# Altium PCB CH32H417MEU6-UHSIF-Bottom-R0.PcbDoc (part 1 of 2)
Units mm, origin at the board's own origin, x right, y up, seen from the top; angles counter-clockwise.
Board outline 65 x 45 mm, 4 copper layers (Top Layer, Layer 1, Layer 2, Bottom Layer), stack 0.603 mm thick; 56 components, 86 nets, 278 pads, 436 vias.
Unrouted connection lines stored in the file: 33.
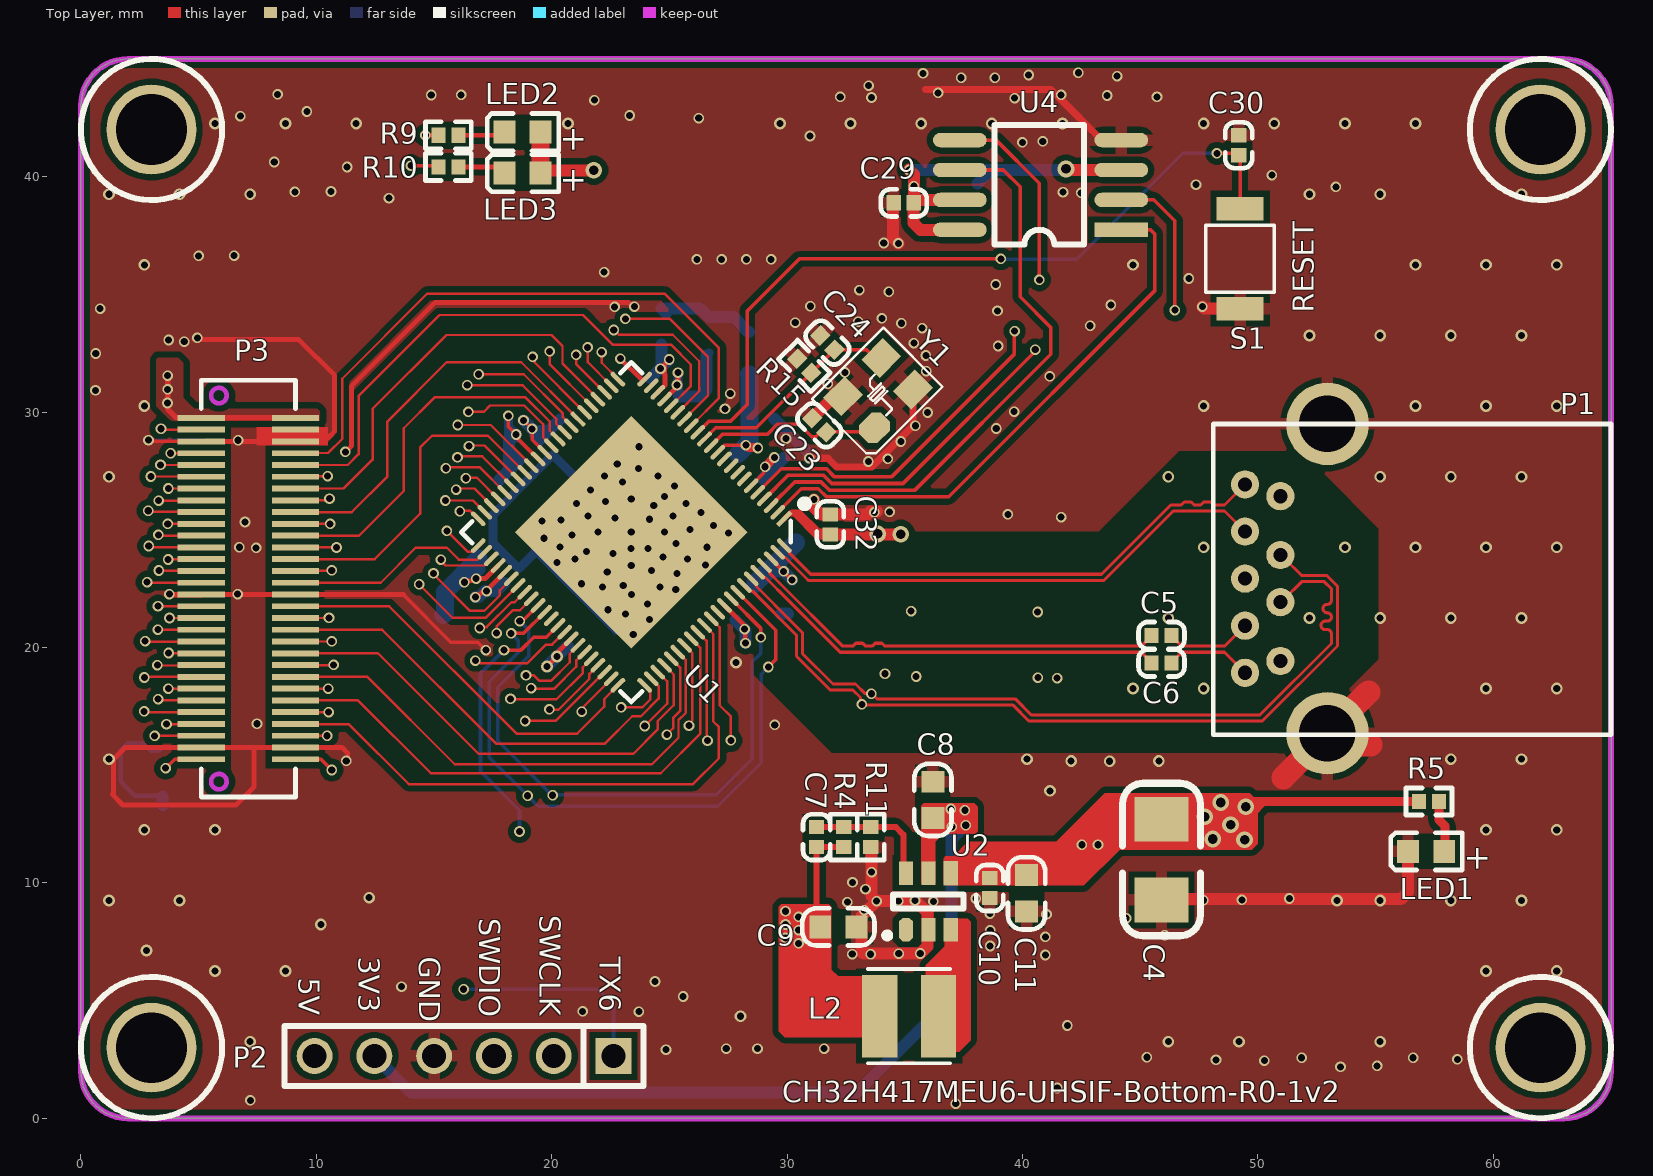
[diagram p0: Top Layer view]
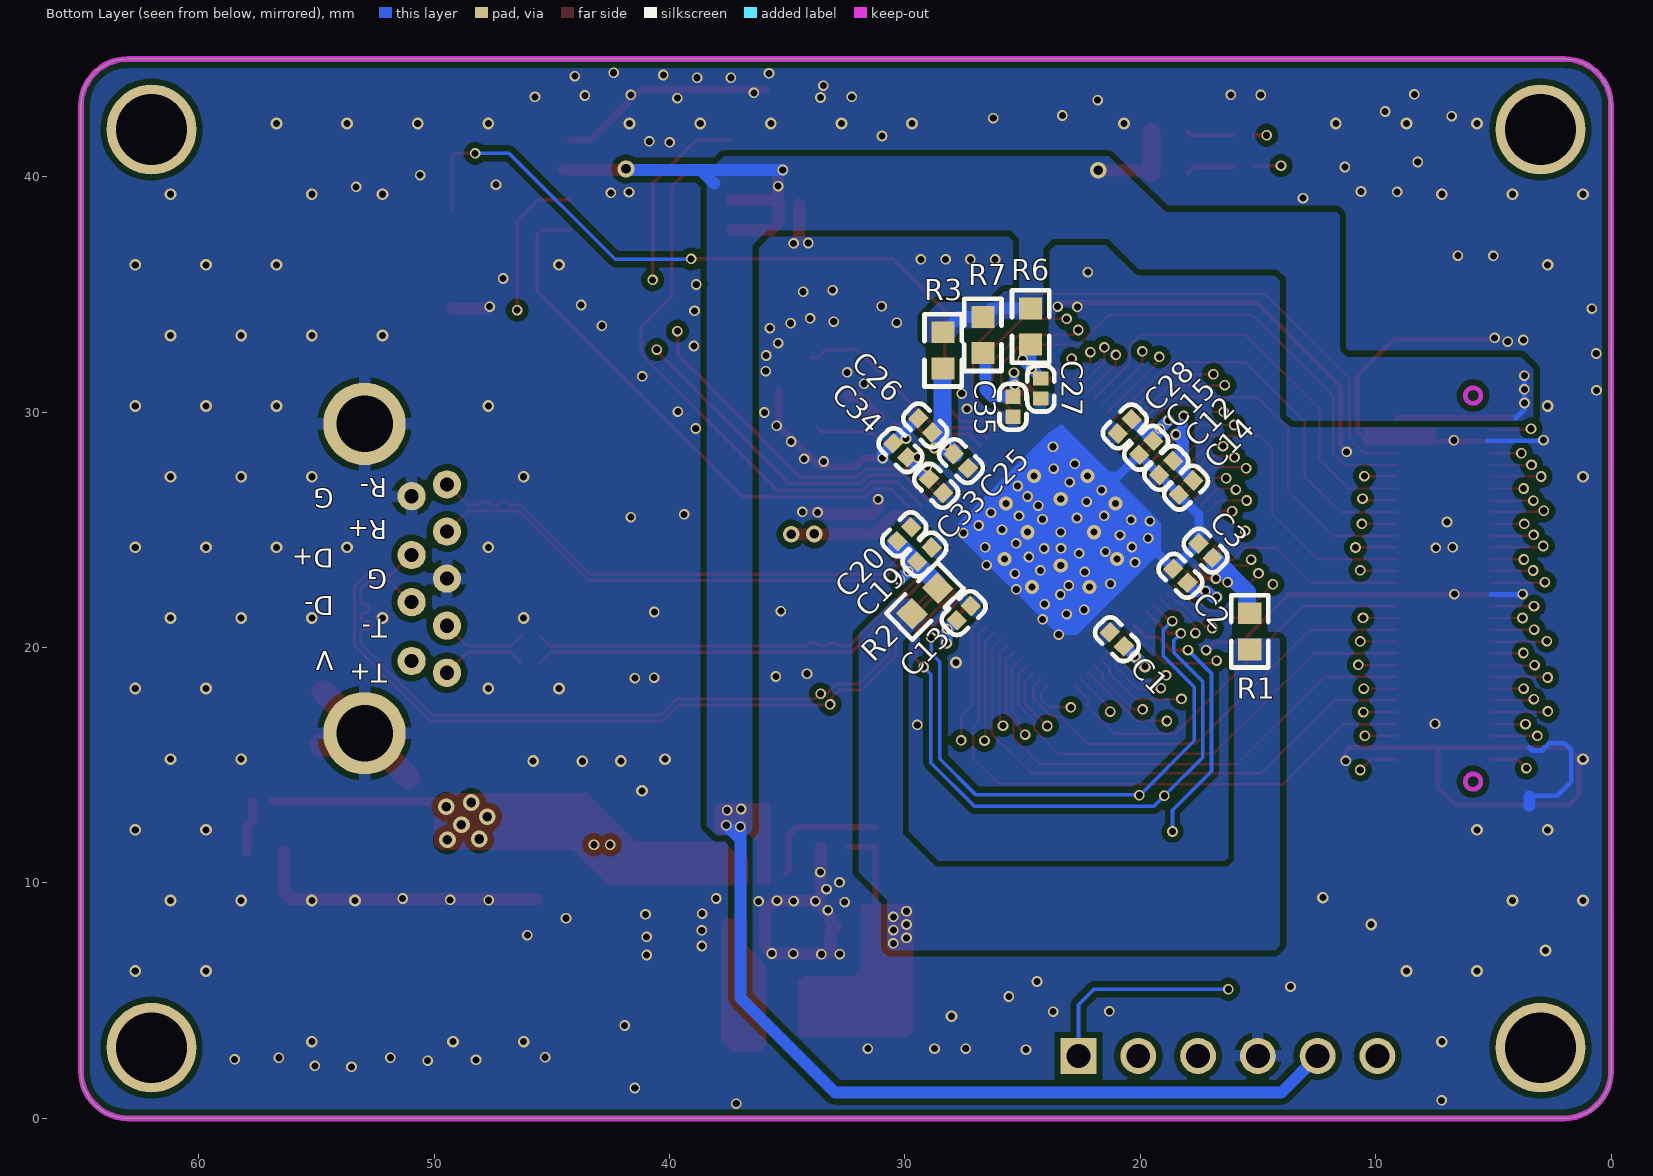
[diagram p1: Bottom Layer view, seen from below]
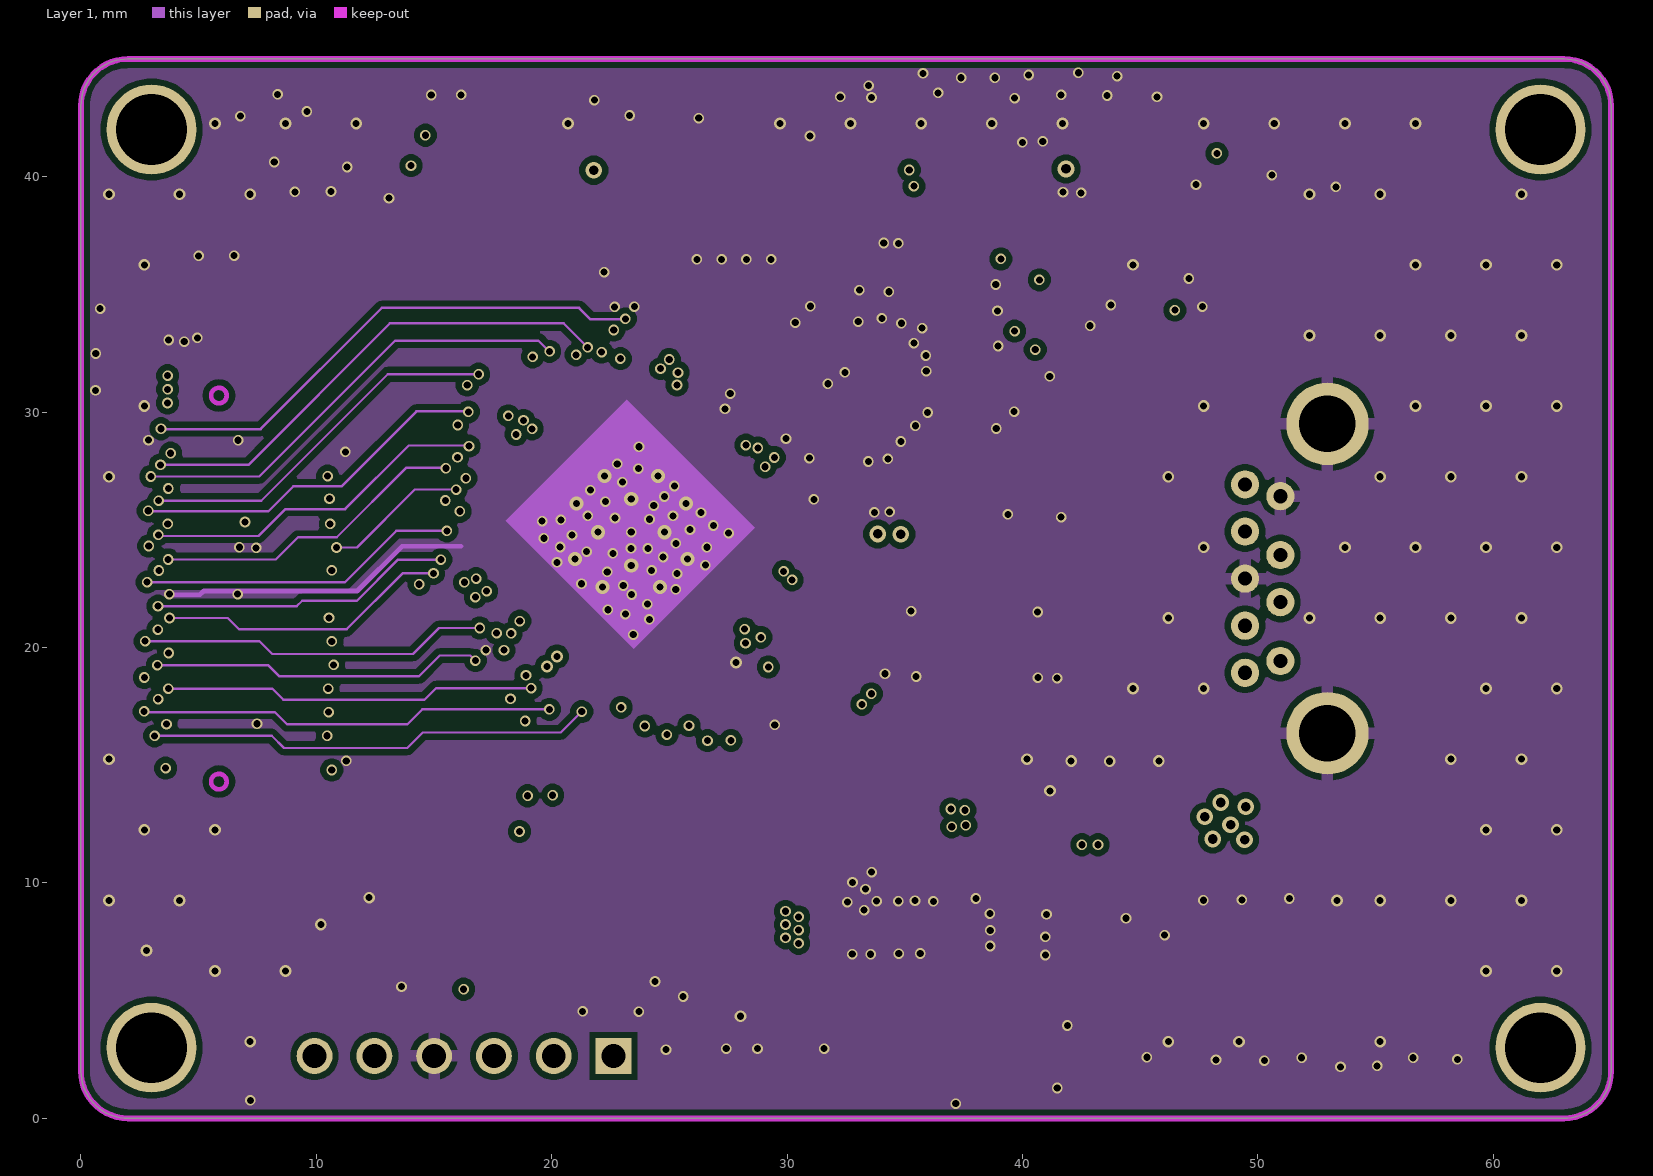
[diagram p2: Layer 1]
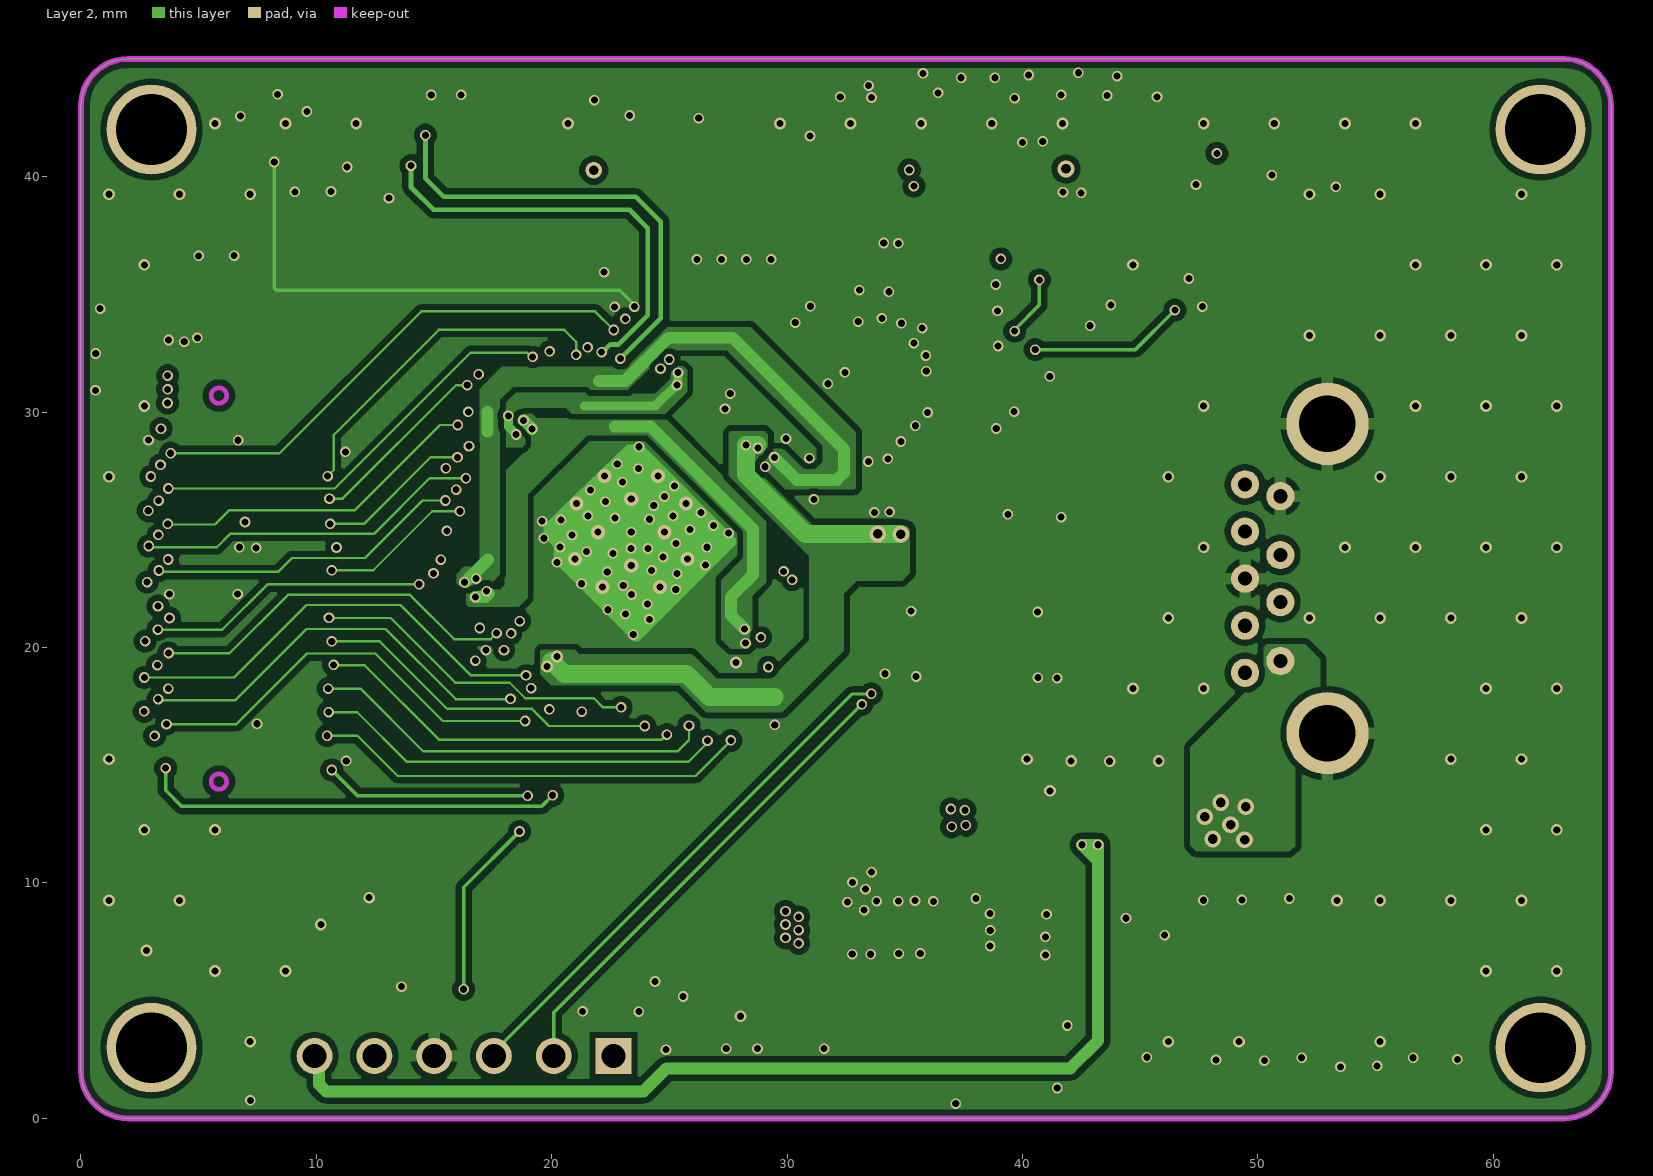
[diagram p3: Layer 2]

## Layer stack, top to bottom
Top Solder: solder mask 0.0102, Solder Resist, Dk 3.5
Top Layer: signal copper 0.0356
Dielectric 2: prepreg 0.0711, PP-006, Dk 4.1
Layer 1: signal copper 0.035
Dielectric 1: dielectric 0.32, FR-4, Dk 4.8
Layer 2: signal copper 0.035
Dielectric 3: prepreg 0.0711, PP-006, Dk 4.1
Bottom Layer: signal copper 0.0356
Bottom Solder: solder mask 0.0102, Solder Resist, Dk 3.5

## Board outline
0,2 ccw(c2,2) 2,0 63,0 ccw(c63,2) 65,2 65,43 ccw(c63,43) 63,45 2,45 ccw(c2,43) 0,43

## Design rules (kind name [scope] priority, off if disabled: settings)
Clearance Clearance_1 [InPolygon] p1: gap=0.254 ignorepadtopadclearanceinfootprint=FALSE
Clearance [All] p2: gap=0.127 ignorepadtopadclearanceinfootprint=FALSE except(0.102: Arc-SMDPad Track-SMDPad; 0.152: Arc-THPad Arc-Via Track-THPad Track-Via Via-Fill Via-Poly Via-Region)
ComponentClearance [All] p1 off: gap=0.254 collisioncheckmode=3 verticalgap=0.254 showdistances=FALSE
DiffPairsRouting [All] p1: maxlimit=0.254 minlimit=0.127 mostfreqgap=0.203 toplayer_minwidth=0.102 toplayer_maxwidth=0.381 toplayer_prefwidth=0.203 midlayer1_minwidth=0.102 midlayer1_maxwidth=0.381 midlayer1_prefwidth=0.203 midlayer2_minwidth=0.102 midlayer2_maxwidth=0.381 midlayer2_prefwidth=0.203 bottomlayer_minwidth=0.102 bottomlayer_maxwidth=0.381 bottomlayer_prefwidth=0.203 maxuncoupledlength=12.7
HoleToHoleClearance [All] p1: gap=0.203 allowstackedmicrovias=TRUE
MinimumAnnularRing [All] p1: minimumring=0.07
MinimumSolderMaskSliver [All] p1 off: minsoldermaskwidth=0.254
PlaneConnect [All] p1: planeconnectstyle=Direct reliefexpansion=0.508 reliefentries=4 reliefconductorwidth=0.254 reliefairgap=0.254
PolygonConnect PolygonConnect_2 [InPolygonClass('New Class')] p1: connectstyle=Direct reliefconductorwidth=0.254 reliefentries=4 polygonreliefangle="90 Angle" airgapwidth=0.254
PolygonConnect PolygonConnect_1 [IsVia] p2: connectstyle=Direct reliefconductorwidth=0.254 reliefentries=4 polygonreliefangle="90 Angle" airgapwidth=0.254
PolygonConnect [All] p3: connectstyle=Relief reliefconductorwidth=0.508 reliefentries=4 polygonreliefangle="90 Angle" airgapwidth=0.254
RoutingVias [All] p1: holewidth=0.2 width=0.45 viastyle="Through Hole" minholewidth=0.15 minwidth=0.3 maxholewidth=0.711 maxwidth=1.27
SilkToSilkClearance [All] p1 off: silktosilkclearance=0.254
SilkToSolderMaskClearance [IsPad] p1 off: minsilkscreentomaskgap=0.254 clearancetoexposedcopper=TRUE
SolderMaskExpansion [All] p1: expansion=0.051 istentingtop=FALSE
Width [All] p1: maxlimit=2.54 minlimit=0.102 preferedwidth=0.127
23 further rules are at their usual default settings.

## Classes and differential pairs
net class NewClass: UFP0 UFP1 UFP2 UFP3 UFP4 UFP5 UFP6 UFP7 UFP8 UFP9 UFP10 UFP11 UFP12 UFP13 UFP14 UFP15 UFP16 UFP17 UFP18 UFP19 UFP20 UFP21 UFP22 UFP23 UFP24 UFP25 UFP26 UFP27 UFP28 UFP29 UFP30 UFP31 UFP32 UFP33 UFP34 UFP35 UFP36 UFP37 UFP38 UFP39 UFP40 UFP41 UFP42 UFP43 UFP44 UFP45 UFP46 UFP47 UFPCLK
polygon class "New Class": 1V2 3V3 +5V VDD33 VDDIO VDDK VIO18
component class CH32H417MEU6-UHSIF-Bottom-R0: C1 C2 C3 C4 C5 C6 C7 C8 C9 C10 C11 C12 C13 C14 C15 C19 C20 C23 C24 C25 C26 C27 C28 C29 C30 C32 C33 C34 C35 L2 LED1 LED2 LED3 P1 P2 P3 R1 R2 R3 R4 R5 R6 R7 R9 R10 R11 R15 S1 U1 U2 U4 Y1
differential pair NewDifferentialPair2: +SWCLK -SWDIO
differential pair NewDifferentialPair1: +NetC5_2 -NetC6_2
differential pair USB_SSTX: +USB_SSTX_p -USB_SSTX_n
differential pair USB_SSRX: +USB_SSRX_p -USB_SSRX_n

## Components (designator, comment, footprint, x,y, rotation, side; value= is the part's Value field where it differs from the comment)
C1 "0.1uF" 0402_C 20.692,20.047 r315 bottom
C2 "0.1uF" 0402_C 17.994,22.744 r315 bottom
C3 "0.1uF" 0402_C 17.525,24.416 r135 bottom
C4 "47uF" 3528_C 45.903,12.704 r90 top
C5 "0.1uF" 0402_C 45.476,20.508 r90 top
C6 "0.1uF" 0402_C 45.476,19.34 r90 top
C7 "NC(4.7pF)" 0402_C 31.25,11.518 r180 top
C8 "10uF" 0603_C 36.194,14.293 r270 top
C9 "10uF" 0603_C 32.947,8.127 r180 top
C10 "1uF" 0402_C 38.61,9.358 r180 top
C11 "10uF" 0603_C 40.171,8.788 r90 top
C12 "0.1uF" 0402_C 18.594,27.928 r225 bottom
C13 "0.1uF" 0402_C 27.802,21.158 r45 bottom
C14 "10uF" 0402_C 17.756,27.089 r225 bottom
C15 "0.1uF" 0402_C 20.05,28.181 r45 bottom
C19 "0.1uF" 0402_C 28.865,24.247 r225 bottom
C20 "2.2uF" 0402_C 29.728,25.11 r225 bottom
C23 "20pF" 0402_C 31.068,29.738 r45 top
C24 "20pF" 0402_C 31.413,33.249 r45 top
C25 "0.1uF" 0402_C 27.318,27.616 r315 bottom
C26 "10uF" 0402_C 29.435,29.733 r135 bottom
C27 "0.1uF" 0402_C 24.224,30.57 r0 bottom
C28 "2.2uF" 0402_C 20.956,29.087 r45 bottom
C29 "0.1uF" 0402_C 34.53,38.885 r90 top
C30 "0.1uF" 0402_C 49.186,41.757 r0 top
C32 "0.1uF" 0402_C 31.829,25.654 r0 top
C33 "0.1uF" 0402_C 28.371,26.562 r315 bottom
C34 "2.2uF" 0402_C 30.488,28.679 r135 bottom
C35 "0.1uF" 0402_C 25.408,29.801 r0 bottom
L2 "2.2uH" CD32 35.181,4.34 r180 top
LED1 "RED" 0603+ 57.913,11.335 r180 top
LED2 "BLUE" 0603+ 19.528,41.892 r180 top
LED3 "GREEN" 0603+ 19.528,40.148 r180 top
P1 "USB3.0-A" USB3.0-A-RECEPTACLE 50.952,19.424 r90 top
P2 "HEADER 6" SIP6-2.54mm 22.624,2.646 r270 top
P3 "HEADER 30x2" BTB-60P-P0.5-MR 7.112,22.5 r270 top
R1 "0R" 0603 15.348,21.451 r270 bottom
R2 "0R" 0603 28.608,22.518 r315 bottom
R3 "0R" 0603 28.375,31.851 r90 bottom
R4 "0Ω" 0402 32.401,11.518 r90 top
R5 "1K" 0402 57.691,13.456 r180 top
R6 "0R" 0603 24.659,32.864 r90 bottom
R7 "0R" 0603 26.685,32.503 r90 bottom
R9 "470Ω" 0402 15.184,41.757 r0 top
R10 "470Ω" 0402 15.184,40.413 r0 top
R11 "NC(200k)" 0402 33.553,12.368 r270 top
R15 "NC" 0402 30.425,32.261 r315 top
S1 "" 贴片按键 49.239,38.635 r270 top
U1 "CH32H417MEU6" QFN88_10X10 23.378,24.895 r135 top
U2 "CH2003V" SOT-23-6 35.049,8.015 r0 top
U4 "SPI FLASH" SOIC-8_208mil 44.194,37.742 r90 top
Y1 "25M" XT3225 33.716,29.329 r45 top
? "Comment" HOLE 62,3 r0 top
? "Comment" HOLE 3,3 r0 top
? "Comment" HOLE 3,42 r0 top
? "Comment" HOLE 62,42 r0 top

## Footprints (in the part's own frame and the unit in brackets; to place one, negate y for a bottom-side part, rotate by r counter-clockwise, add the part's x,y. Pads: shape width x height; smd on the part's side, far side on the other; paste and mask are expansions set on the pad)
0402 [mm]
  rect 0.6x0.65 smd mask+0.051: 1(0,0) 2(0.85,0)
  silkscreen extent -0.55,-0.58 1.4,0.57
0402_C [mm]
  rect 0.65x0.6 smd mask+0.051: 1(0,0) 2(0,-0.85)
  silkscreen extent -0.58,-1.4 0.57,0.55
0603 [mm]
  rect 0.93x0.98 smd: 1(0,0) 2(1.54,0)
  silkscreen extent -0.76,-0.79 2.3,0.79
0603+ [mm]
  rect 0.93x0.98 smd: 1(0,0) 2(1.54,0)
  silkscreen extent -0.76,-0.79 2.27,0.79
0603_C [mm]
  rect 0.93x0.98 smd mask+0.051: 1(0,0) 2(1.54,0)
  silkscreen extent -0.76,-0.79 2.31,0.79
3528_C [mil]
  rect 75x90 smd: 1(0,0) 2(-135,0)
  silkscreen extent -195,-65 60,65
BTB-60P-P0.5-MR [mm]
  rect 0.25x2 smd mask+0.051: 1(-7.25,-2) 2(-7.25,2) 3(-6.75,-2) 4(-6.75,2) 5(-6.25,-2) 6(-6.25,2) 7(-5.75,-2) 8(-5.75,2) 9(-5.25,-2) 10(-5.25,2) 11(-4.75,-2) 12(-4.75,2) 13(-4.25,-2) 14(-4.25,2) 15(-3.75,-2) 16(-3.75,2) 17(-3.25,-2) 18(-3.25,2) 19(-2.75,-2) 20(-2.75,2) 21(-2.25,-2) 22(-2.25,2) 23(-1.75,-2) 24(-1.75,2) 25(-1.25,-2) 26(-1.25,2) 27(-0.75,-2) 28(-0.75,2) 29(-0.25,-2) 30(-0.25,2) 31(0.25,-2) 32(0.25,2) 33(0.75,-2) 34(0.75,2) 35(1.25,-2) 36(1.25,2) 37(1.75,-2) 38(1.75,2) 39(2.25,-2) 40(2.25,2) 41(2.75,-2) 42(2.75,2) 43(3.25,-2) 44(3.25,2) 45(3.75,-2) 46(3.75,2) 47(4.25,-2) 48(4.25,2) 49(4.75,-2) 50(4.75,2) 51(5.25,-2) 52(5.25,2) 53(5.75,-2) 54(5.75,2) 55(6.25,-2) 56(6.25,2) 57(6.75,-2) 58(6.75,2) 59(7.25,-2) 60(7.25,2)
  Keep-Out Layer circle w0.2: c-8.2,-1.25 r0.33
  Keep-Out Layer circle w0.2: c8.2,-1.25 r0.33
  silkscreen extent -8.85,-2 8.85,2
CD32 [mm]
  rect 1.5x3.5 smd: 1(-1.25,0) 2(1.25,0)
  silkscreen extent -1.75,-2 1.75,2
HOLE [mm]
  round 3.81 hole 3: 0(0,0)
  silkscreen extent -3,-3 3,3
QFN88_10X10 [mm]
  rect 7x7 smd mask+0.051: 0(0,0)
  rect 0.2x0.8 smd mask+0.051: 1(-4.2,-5)
  oval 0.2x0.8 smd mask+0.051: 2(-3.8,-5) 3(-3.4,-5) 4(-3,-5) 5(-2.6,-5) 6(-2.2,-5) 7(-1.8,-5) 8(-1.4,-5) 9(-1,-5) 10(-0.6,-5) 11(-0.2,-5) 12(0.2,-5) 13(0.6,-5) 14(1,-5) 15(1.4,-5) 16(1.8,-5) 17(2.2,-5) 18(2.6,-5) 19(3,-5) 20(3.4,-5) 21(3.8,-5) 22(4.2,-5) 45(4.2,5) 46(3.8,5) 47(3.4,5) 48(3,5) 49(2.6,5) 50(2.2,5) 51(1.8,5) 52(1.4,5) 53(1,5) 54(0.6,5) 55(0.2,5) 56(-0.2,5) 57(-0.6,5) 58(-1,5) 59(-1.4,5) 60(-1.8,5) 61(-2.2,5) 62(-2.6,5) 63(-3,5) 64(-3.4,5) 65(-3.8,5) 66(-4.2,5)
  oval 0.8x0.2 smd mask+0.051: 23(5,-4.2) 24(5,-3.8) 25(5,-3.4) 26(5,-3) 27(5,-2.6) 28(5,-2.2) 29(5,-1.8) 30(5,-1.4) 31(5,-1) 32(5,-0.6) 33(5,-0.2) 34(5,0.2) 35(5,0.6) 36(5,1) 37(5,1.4) 38(5,1.8) 39(5,2.2) 40(5,2.6) 41(5,3) 42(5,3.4) 43(5,3.8) 44(5,4.2) 67(-5,4.2) 68(-5,3.8) 69(-5,3.4) 70(-5,3) 71(-5,2.6) 72(-5,2.2) 73(-5,1.8) 74(-5,1.4) 75(-5,1) 76(-5,0.6) 77(-5,0.2) 78(-5,-0.2) 79(-5,-0.6) 80(-5,-1) 81(-5,-1.4) 82(-5,-1.8) 83(-5,-2.2) 84(-5,-2.6) 85(-5,-3) 86(-5,-3.4) 87(-5,-3.8) 88(-5,-4.2)
  silkscreen extent -5.1,-6.19 5.1,5.1
SIP6-2.54mm [mil]
  rect 60x60 hole 40: 1(0,0)
  round 60 hole 40: 2(0,-100) 3(0,-200) 4(0,-300) 5(0,-400) 6(0,-500)
  silkscreen extent -50,-550 50,50
SOIC-8_208mil [mil]
  rect 24x90 smd: 1(0,0)
  oval 24x90 smd: 2(50,0) 3(100,0) 4(150,0) 5(150,270) 6(100,270) 7(50,270) 8(0,270)
  silkscreen extent -25,62 175,212
SOT-23-6 [mm] "SOT-23-6"
  oct 0.6x1 smd: 1(0,0)
  rect 0.6x1 smd: 2(0.95,0) 3(1.9,0) 5(0.95,2.4) 6(0,2.4)
  rect 0.6x1.04 smd: 4(1.9,2.4)
  silkscreen extent -0.93,-0.38 2.45,1.49
USB3.0-A-RECEPTACLE [mm]
  round 3.5 hole 2.4: 0(-3.07,-2) 0(10.07,-2)
  round 1.2 hole 0.6: 1(0,0) 2(2.5,0) 3(4.5,0) 4(7,0) 5(7.5,1.5) 6(5.5,1.5) 7(3.5,1.5) 8(1.5,1.5) 9(-0.5,1.5)
  silkscreen extent -3.14,-14.04 10.07,2.85
XT3225 [mm]
  oct 1.3x1.1 smd: 1(0,0)
  rect 1.3x1.1 smd: 2(2.3,0) 3(2.3,1.9) 4(0,1.9)
  silkscreen extent -1.02,-0.8 3.27,2.74
贴片按键 [mm]
  rect 1x2 smd: 1(0,0) 2(4.242,0)
  silkscreen extent 0.69,-1.45 3.55,1.45

## Part data
C1 C2 C3 C4 C5 C6 C7 C8 C9 C10 C11 C12 C13 C14 C15 C19 C20 C23 C24 C25 C26 C27 C28 C29 C32 C33 C34 C35: library part CAP, "Capacitor"
C30: library part Cap, "Capacitor"
L2: library part INDUCTOR
LED1 LED2 LED3: library part LED, "Typical INFRARED GaAs LED"
P2: "Header, 6-Pin"
P3: "Header, 30-Pin, Dual row"
R1 R2 R3 R4 R5 R6 R7 R9 R10 R11 R15: library part RES
S1: library part KEY1
U1: "RISC-V FPU HD-MCU, 384MHz, USB3.0 & PD, 100M Ethernet, DVP, SDMMC, QSPI, OPA, ADC, DAC"
U2: library part CH2003K, "Step-Down DC-DC Converter, 5V input, FB 0.6V, 800mA output, with LDO 3.3V * 200mA"
U4: library part W25Q64
Y1: library part XTAL, "Crystal Oscillator", LatestRevisionDate=17-Jul-2002, LatestRevisionNote="Re-released for DXP Platform.", PackageReference=R38, Published=8-Jun-2000, Publisher="Altium Limited"

## Via types
v1: diameter 0.45, hole 0.3, Top Layer to Bottom Layer, tented both sides, 329 vias
v2: diameter 0.5, hole 0.3, Top Layer to Bottom Layer, tented both sides, 85 vias
v3: diameter 0.6, hole 0.3, Top Layer to Bottom Layer, tented both sides, 12 vias
v4: diameter 0.711, hole 0.406, Top Layer to Bottom Layer, tented both sides, 10 vias

## Nets (pads, with @x,y where several pads share a name; then routed paths per layer and width w, separated by ;. In a path a pad name is that pad's centre, name@x,y a point inside that pad or via, vN(x,y) a via of type N, cw(c..) or ccw(c..) an arc to the next point about the centre after c; other vN are vias at no path point)
1V2: C7.1 C9.2 L2.2 R1.2 R2.2 R4.1 | length 4.4
  Top Layer w0.254: 31.25,8.662 C7.1@31.25,11.518 R4.1@32.401,11.518
  Bottom Layer w0.508: R2.2@29.731,21.413 29.766,21.447 30.013,21.447 R2.2@30.047,21.413
  other v1: 30.489,7.429 29.93,7.666 30.489,7.992 29.93,8.229 30.489,8.555 29.93,8.792
3V3: C8.2 C29.2 LED2.1 LED3.1 P2.5 P3.1 P3.2 R3.2 R6.2 R7.2 U2.5 U4.3 U4.7 U4.8 | length 69.1
  Top Layer w0.229: v1(3.678,30.384) v1@3.683,30.379 ; v1(3.683,31.546) v1(3.683,30.963) v1@3.683,30.379 ; P3.2@9.112,29.75 P3.1@5.112,29.75 4.06,29.75 3.683,30.127 v1@3.683,30.379
  Top Layer w0.508: LED3.1@19.488,40.253 19.504,40.269 19.528,40.269 v4(21.787,40.269) ; v1@35.17,40.298 35.387,40.081 35.387,38.892 C29.2@35.38,38.885 ; C29.2@35.358,38.952 35.358,38.039 35.656,37.742 U4.8@37.336,37.742 ; C29.2@35.484,38.974 35.522,39.012 U4.7@37.336,39.012 ; v4@41.82,40.282 U4.3@44.194,40.282 ; U4.3@44.469,40.324 U4.3@44.492,40.301
  Top Layer w0.762: LED3.1@19.528,40.148 19.528,40.269 LED2.1@19.528,41.892
  Bottom Layer w0.203: v1(3.678,30.384) v1@3.683,30.379 ; v1(3.683,31.546) v1(3.683,30.963) v1@3.683,30.379 ; 4.039,29.75 3.683,30.106 v1@3.683,30.379
  Bottom Layer w0.508: P2.5@12.464,2.646 14.018,1.092 32.964,1.092 36.991,5.119 36.991,11.851 ; R6.2@24.659,34.404 R6.2@24.852,34.211 ; R6.2@24.684,34.404 26.3,34.404 26.66,34.043 27.722,34.043 28.139,33.627 28.139,33.602 28.35,33.391 R3.2@28.375,33.391 ; v1(35.186,40.282) 38.664,40.282 ; v1(36.991,12.384) 36.991,11.851 ; v1(37.587,12.447) 36.991,11.851 ; 38.09,39.708 38.664,40.282 ; 39.191,40.282 38.664,40.282 ; v4@41.748,40.378 41.652,40.282 38.664,40.282
  other v1: 37.547,13.084 36.957,13.135 35.383,39.594
  other v4: 41.844,40.325
+5V: C4.1 C10.2 C11.2 P1.1 P2.6 R5.2 U2.4 | length 57.6
  Top Layer w0.381: C4.1@46.648,13.456 50.231,13.456 ; 49.705,12.93 50.231,13.456 ; 51.485,13.456 50.231,13.456 ; R5.2@56.841,13.456 50.231,13.456
  Layer 2 w0.508: P2.6@9.924,2.646 10.119,2.452 10.119,1.433 10.416,1.136 23.894,1.136 24.874,2.116 42.028,2.116 43.205,3.293 43.205,10.932 ; 43.205,10.932 v1(43.205,11.619) v1(42.518,11.619) 43.205,10.932
  other v4: 49.432,11.832 48.08,11.863 48.835,12.471 47.741,12.803 49.484,13.236 48.419,13.414
GND: C1.2 C2.2 C3.1 C4.2 C8.1 C9.1 C10.1 C11.1 C12.2 C13.2 C14.2 C15.1 C19.1 C20.1 C23.1 C24.1 C25.1 C26.1 C27.1 C28.1 C29.1 C30.1 C32.1 C33.1 C34.1 C35.1 LED1.2 P1.0 P1.4 P1.7 P2.4 P3.4 P3.5 P3.6 P3.31 P3.32 P3.57 P3.58 R11.2 R15.1 S1.2 U1.0 U2.2 U4.4 Y1.2 Y1.4 | length 183
  Top Layer w0.152: v1(2.87,28.803) 2.909,28.764 5.098,28.764 P3.5@5.112,28.75 ; v1@3.759,22.239 v1@3.765,22.244 ; P3.31@5.106,22.244 P3.31@5.112,22.25 ; 13.688,22.25 15.715,20.223 16.862,20.223 v1(17.199,19.886)
  Top Layer w0.203: v1@4.805,33.079 9.251,33.079 10.773,31.556 10.773,29.178 10.513,28.918 ; P3.5@5.112,28.75 P3.6@9.112,28.75 10.278,28.75 10.446,28.918 10.513,28.918 ; 7.358,15.749 7.358,14.078 6.584,13.304 1.788,13.304 1.331,13.762 1.388,13.819 1.388,15.261 1.877,15.75 P3.57@5.112,15.75 P3.58@9.112,15.75 11.104,15.75 11.339,15.514 11.339,15.19 v1@11.396,15.133 ; P3.4@9.112,29.25 10.181,29.25 10.513,28.918 ; v1(11.235,28.306) 11.498,28.568 11.498,31.107 15.038,34.647 23.268,34.647 23.441,34.474 v1(23.508,34.474)
  Top Layer w0.229: v1@3.765,22.244 P3.31@5.106,22.244 ; P3.31@5.112,22.25 P3.32@9.112,22.25 13.688,22.25
  Top Layer w0.305: v1(30.943,28.039) 31.723,28.039 31.821,27.941 32.098,27.664 33.592,27.664 35.343,29.415 Y1.2@35.343,30.955 ; 35.872,43.695 v1@36.41,43.695 ; v1@36.41,43.628 36.45,43.588 36.477,43.588 36.584,43.695 41.212,43.695 41.404,43.504 41.573,43.504 41.592,43.484 v1@41.592,43.428 ; v1@41.535,43.372 43.355,41.552 U4.4@44.194,41.552
  Top Layer w0.508: C23.1@31.068,29.738 32.002,30.672 Y1.4@32.373,30.672 ; v1(31.137,26.29) 31.137,25.951 31.434,25.654 C32.1@31.829,25.654 33.403,25.654 33.519,25.77 v1@33.826,25.77 ; R11.2@33.553,11.518 33.592,11.479 33.592,9.433 v1(33.799,9.226) ; C29.1@34.503,38.814 34.503,37.386 v1(34.721,37.168) ; U2.2@35.953,7.969 35.953,7.297 v1(35.655,6.999) 33.244,6.999 33.158,7.086 33.158,7.916 C9.1@32.947,8.127 33.158,8.338 33.158,8.584 33.343,8.769 v1(33.799,9.226) ; U2.2@35.999,8.015 35.953,8.061 35.953,8.752 35.46,9.244 v1(35.432,9.244) 35.414,9.226 v1(33.799,9.226) ; C4.2@45.635,9.311 56.075,9.311 56.373,9.609 LED1.2@56.373,11.335 ; v1(47.641,34.477) 47.725,34.393 S1.2@49.239,34.393
  Top Layer w1: 51.073,14.474 P1.0@52.952,16.354 ; 54.701,18.102 P1.0@52.952,16.354 ; 54.788,15.858 54.771,15.875 53.431,15.875 P1.0@52.952,16.354
  Layer 1 w0.203: v1@3.759,22.239 5.058,22.239 5.216,22.398 11.741,22.398 13.642,24.299 16.15,24.299
  Layer 2 w0.152: v1(8.213,40.62) 8.213,35.263 8.303,35.173 22.889,35.173 23.508,34.555 v1(23.508,34.474)
  Bottom Layer w0.203: v1(2.87,28.803) 2.891,28.782 5.256,28.782 ; 3.465,13.676 3.44,13.701 2.289,13.701 1.694,14.296 1.694,15.653 1.97,15.929 2.636,15.929 2.943,15.622 3.358,15.622 3.486,15.75 ; v1@3.759,22.239 3.767,22.246 5.108,22.246 5.112,22.25
  Bottom Layer w0.381: 19.843,24.895 19.779,24.832 19.779,24.53 C2.2@18.595,23.346 C3.1@17.525,24.416 17.508,24.433 17.508,25.639 C12.2@19.196,27.327 C15.1@20.05,28.181 20.943,27.288 v3(22.236,27.288)
  Bottom Layer w0.508: 3.465,13.676 3.465,13.309 3.489,13.286 ; C26.1@29.435,29.733 30.479,28.688 C34.1@30.497,28.688 ; C34.1@30.488,28.679 30.943,28.224 v1(30.943,28.039)
  other v1: 37.162,0.62 7.195,0.76 41.474,1.287 53.506,2.18 55.06,2.223 50.273,2.449 48.217,2.479 58.473,2.501 51.857,2.571 56.593,2.571 45.277,2.592 24.856,2.917 27.412,2.961 28.741,2.961 31.568,2.961 41.901,3.942 21.311,4.538 23.698,4.532 25.578,5.174 13.618,5.591 24.388,5.81 40.971,6.936 32.765,6.971 33.544,6.966 34.741,6.995 38.623,7.316 40.971,7.702 46.034,7.778 38.629,7.984 44.393,8.496 41.017,8.663 38.609,8.692 33.271,8.841 32.555,9.18 36.214,9.214 34.727,9.226 47.679,9.26 49.313,9.275 38.016,9.336 51.33,9.334 33.328,9.736 32.775,10.024 33.592,10.456 11.272,15.181 29.473,16.711 7.479,16.758 41.472,18.696 40.651,18.721 35.482,18.767 34.156,18.884 23.463,20.542 24.145,21.194 23.127,21.417 40.639,21.507 35.268,21.542 22.386,21.6 24.065,21.837 23.397,22.248 3.759,22.264 6.657,22.264 25.267,22.468 23.038,22.631 21.263,22.705 25.324,23.133 22.358,23.211 24.241,23.273 26.526,23.498 20.223,23.617 24.733,23.84 22.595,23.996 21.486,24.071 24.086,24.202 7.441,24.231 23.367,24.208 6.73,24.256 26.586,24.257 20.356,24.268 25.276,24.42 19.666,24.638 20.862,24.769 27.518,24.858 23.378,24.895 25.874,25.006 26.867,25.178 6.971,25.327 19.596,25.368 20.389,25.417 24.154,25.445 22.689,25.498 41.635,25.537 21.536,25.592 25.151,25.592 39.373,25.653 26.339,25.723 33.704,25.74 34.354,25.762 24.334,26.022 22.277,26.196 24.787,26.412 21.642,26.683 25.206,26.857 23,27.019 23.68,27.599 22.782,27.798 33.451,27.898 34.279,28.009 23.706,28.524 34.834,28.748 6.682,28.802 29.952,28.869 38.882,29.301 35.446,29.417 35.967,29.982 39.643,30.015 27.358,30.133 27.582,30.78 0.62,30.922 31.731,31.201 41.154,31.513 32.455,31.685 35.909,31.741 35.891,32.403 0.631,32.484 38.963,32.805 35.386,32.925 4.389,32.994 3.725,33.061 4.947,33.148 35.737,33.567 42.87,33.665 34.855,33.772 30.343,33.797 33.021,33.842 34.025,33.977 38.937,34.297 0.813,34.393 22.672,34.469 30.989,34.494 43.753,34.547 34.321,35.11 33.069,35.175 38.86,35.416 47.063,35.673 22.224,35.943 26.162,36.482 27.214,36.482 28.266,36.482 29.318,36.482 5.001,36.631 6.505,36.646 34.103,37.181 13.087,39.088 42.487,39.311 41.718,39.343 9.088,39.35 10.623,39.369 53.312,39.566 47.367,39.659 50.593,40.063 11.311,40.41 39.993,41.457 40.858,41.5 30.971,41.724 26.246,42.484 6.77,42.569 23.306,42.597 9.597,42.767 21.813,43.246 39.661,43.334 33.584,43.363 32.255,43.391 45.71,43.391 43.59,43.447 14.882,43.467 16.154,43.476 41.64,43.476 8.353,43.491 36.41,43.561 33.459,43.867 37.392,44.2 38.824,44.2 44.015,44.27 40.257,44.317 35.771,44.388 42.371,44.411
  other v2: 7.192,3.252 46.192,3.252 49.192,3.252 55.192,3.252 28.02,4.332 5.692,6.252 8.692,6.252 59.692,6.252 62.692,6.252 2.781,7.128 10.192,8.236 1.192,9.252 4.192,9.252 53.36,9.249 55.192,9.252 58.192,9.252 61.192,9.252 12.244,9.371 2.692,12.252 5.692,12.252 59.692,12.252 62.692,12.252 41.166,13.911 42.064,15.175 43.701,15.167 45.788,15.175 1.192,15.252 40.192,15.252 58.192,15.252 61.192,15.252 44.692,18.252 47.692,18.252 59.692,18.252 62.692,18.252 27.831,19.365 46.192,21.252 52.192,21.252 55.192,21.252 58.192,21.252 61.192,21.252 47.692,24.252 53.692,24.252 56.692,24.252 59.692,24.252 62.692,24.252 1.192,27.252 46.192,27.252 55.192,27.252 58.192,27.252 61.192,27.252 2.692,30.252 47.692,30.252 56.692,30.252 59.692,30.252 62.692,30.252 52.192,33.252 55.192,33.252 58.192,33.252 61.192,33.252 2.692,36.252 44.692,36.252 56.692,36.252 59.692,36.252 62.692,36.252 1.192,39.252 4.192,39.252 7.192,39.252 52.192,39.252 55.192,39.252 61.192,39.252 5.692,42.252 8.692,42.252 11.692,42.252 20.692,42.252 29.692,42.252 32.692,42.252 35.692,42.252 38.692,42.252 41.692,42.252 47.692,42.252 50.692,42.252 53.692,42.252 56.692,42.252
  other v3: 22.164,22.574 24.593,22.574 23.378,23.481 20.985,23.752 25.771,23.752 21.964,24.895 24.792,24.895 21.057,26.109 25.699,26.109 23.378,26.309 24.521,27.288
LED1: R9.1 U1.22 | length 21.1
  Top Layer w0.203: v1(14.634,41.757) R9.1@15.184,41.757 ; v1(22.917,32.267) 23.863,31.321 23.865,31.321 U1.22@23.944,31.4
  Layer 2 w0.203: v1(14.634,41.757) 14.634,39.927 15.415,39.145 23.568,39.145 24.627,38.087 24.627,33.977 v1(22.917,32.267)
LED2: R10.1 U1.23 | length 20.6
  Top Layer w0.102: v1(22.122,32.542) 22.122,32.09 U1.23@22.813,31.4
  Top Layer w0.152: v1(14.021,40.466) 15.13,40.466 R10.1@15.184,40.413
  Layer 2 w0.203: v1(14.021,40.466) 14.021,39.55 14.981,38.59 23.304,38.59 24.081,37.813 24.081,34.111 22.841,32.872 22.49,32.872 22.161,32.542 v1(22.122,32.542)
NetC5_2: C5.2 P1.8 | length 3.7
  Top Layer w0.13: C5.2@46.326,20.508 46.326,20.483 46.757,20.052 48.58,20.052 P1.8@49.452,20.924
NetC6_2: C6.2 P1.9 | length 3.7
  Top Layer w0.13: C6.2@46.326,19.34 46.326,19.365 46.757,19.796 48.58,19.796 P1.9@49.452,18.924
NetC7_2: C7.2 R4.2 R11.1 U2.6 | length 5.5
  Top Layer w0.254: C7.2@31.25,12.368 R4.2@32.401,12.368 34.622,12.368 34.939,12.05 34.939,10.524 U2.6@35.049,10.415
NetL2_1: L2.1 U2.3
NetLED1_1: LED1.1 R5.1 | length 2.2
  Top Layer w0.381: R5.1@57.691,13.456 57.691,12.661 57.947,12.405 LED1.1@57.947,11.316
NetLED2_2: LED2.2 R9.2 | length 2
  Top Layer w0.203: R9.2@16.034,41.757 17.853,41.757 LED2.2@17.988,41.892
NetLED3_2: LED3.2 R10.2 | length 2.1
  Top Layer w0.203: R10.2@16.034,40.413 17.723,40.413 LED3.2@17.988,40.148
NRST: C30.2 S1.1 U1.14 | length 32.6
  Top Layer w0.152: U1.14@26.207,29.137 26.677,29.608 27.596,29.608 28.314,30.326 28.314,34.298 30.518,36.503 v1(39.079,36.503) ; v1@48.389,40.985 49.108,40.985 49.239,40.854 S1.1@49.239,38.635 ; v1(48.252,40.985) 48.33,40.985 v1(48.252,40.985)
  Bottom Layer w0.152: v1(39.079,36.503) 39.087,36.494 42.308,36.494 46.799,40.985 v1(48.252,40.985)
PA11: U1.56
PF14: U1.78
RX1: P3.60 U1.55 U1.81 | length 39.5
  Top Layer w0.152: P3.60@9.112,15.25 9.12,15.242 10.207,15.242 v1(10.655,14.794) ; v1(18.278,20.595) 18.795,20.595 U1.55@19.701,21.501 ; U1.81@27.904,22.349 29.516,20.737 29.516,19.486 v1(29.2,19.17)
  Layer 2 w0.152: v1(10.655,14.794) 11.749,13.699 v1(18.977,13.699)
  Bottom Layer w0.152: v1(18.278,20.595) 18.579,20.293 18.579,19.786 17.348,18.556 17.348,15.328 v1(18.977,13.699) 19.419,13.257 27.043,13.257 28.894,15.108 28.894,18.864 v1(29.2,19.17)
RX8: P3.59 U1.54 U1.80 | length 46.3
  Top Layer w0.102: P3.59@5.11,15.252 P3.59@5.112,15.25
  Top Layer w0.152: v1(3.598,14.87) 3.98,15.252 P3.59@5.11,15.252 ; v1(18.642,21.119) 18.699,21.176 18.811,21.176 U1.54@19.418,21.784 ; U1.80@27.621,22.066 28.886,20.802 v1(28.886,20.431)
  Layer 2 w0.152: v1(3.598,14.87) 3.598,13.929 4.281,13.246 19.562,13.246 v1(20.038,13.722)
  Bottom Layer w0.152: v1(18.642,21.119) 19.016,20.745 19.016,19.628 17.704,18.317 17.704,16.03 v1@19.984,13.75 ; v1(20.038,13.722) 20.012,13.722 v1@19.984,13.75 ; v1(28.886,20.431) 28.886,19.759 28.522,19.395 28.522,15.276 26.995,13.75 v1@19.984,13.75
SPI_CS: U1.2 U4.1 | length 24.1
  Top Layer w0.152: U1.2@29.601,25.743 30.605,26.747 31.326,26.747 31.668,26.406 36.869,26.406 45.623,35.16 45.623,37.555 45.436,37.742 U4.1@44.194,37.742
SPI_MISO: U1.4 U4.2 | length 27.5
  Top Layer w0.152: U1.4@29.035,26.309 30.032,27.306 31.558,27.306 31.899,26.964 34.919,26.964 40.539,32.584 v1(40.539,32.653) ; U4.2@44.194,39.012 45.576,39.012 46.468,38.12 v1(46.468,34.327)
  Layer 2 w0.152: v1(40.539,32.653) 44.794,32.653 v1(46.468,34.327)
SPI_MOSI: U1.5 U4.5 | length 25.4
  Top Layer w0.152: U1.5@28.752,26.592 29.746,27.586 31.673,27.586 32.015,27.244 34.431,27.244 39.655,32.468 39.655,33.426 v1(39.663,33.433) ; U4.5@37.336,41.552 38.874,41.552 40.714,39.712 v1(40.714,35.618)
  Layer 2 w0.152: v1(39.663,33.433) 39.663,33.493 40.714,34.545 v1(40.714,35.618)
SPI_SCK: U1.3 U4.6 | length 25.3
  Top Layer w0.152: U1.3@29.318,26.026 30.319,27.027 31.442,27.027 31.784,26.685 35.434,26.685 41.199,32.449 41.199,33.589 39.897,34.891 39.897,39.571 39.187,40.282 U4.6@37.336,40.282
SWCLK: P1.3 P2.2 U1.82 | length 54.8
  Top Layer w0.13: U1.82@28.187,22.632 28.412,22.406 28.514,22.406 30.398,20.522 30.398,19.63 31.841,18.187 32.798,18.187 33.116,17.87 33.116,17.643 v1(33.175,17.583) 33.199,17.56 39.581,17.56 40.268,16.874 50.187,16.874 53.377,20.063 53.377,22.598 52.923,23.052 51.856,23.052 51.13,23.778 P1.3@51.13,23.924
  Layer 2 w0.152: P2.2@20.084,3.154 20.084,4.492 v1(33.175,17.583)
SWDIO: P1.2 P2.3 U1.83 | length 56.9
  Top Layer w0.13: U1.83@28.469,22.915 28.695,22.689 28.695,22.588 30.2,21.083 30.654,20.628 30.654,19.736 31.947,18.444 32.904,18.444 33.297,18.051 33.558,18.051 v1(33.577,18.032) ; v1@33.615,17.96 33.67,17.96 33.813,17.816 39.688,17.816 40.374,17.13 50.081,17.13 53.12,20.169 53.12,20.512 53.12,20.577 ccw(c52.941,20.577) 52.941,20.756 52.853,20.756 cw(c52.853,20.935) 52.853,21.114 52.941,21.114 ccw(c52.941,21.294) 52.941,21.473 cw(c52.941,21.652) 52.941,21.831 ccw(c52.941,22.01) 53.12,22.01 53.12,22.266 53.12,22.492 52.817,22.796 51.856,22.796 51.13,22.07 P1.2@51.13,21.924
  Layer 2 w0.13: P2.3@17.666,2.929 32.769,18.032 v1(33.577,18.032)
TX6: P2.1 U1.57 | length 28
  Top Layer w0.152: v1(17.972,19.888) 18.692,19.888 19.241,20.436 19.768,20.436 U1.57@20.267,20.935
  Layer 2 w0.152: v1(16.26,5.481) 16.26,9.811 v1(18.631,12.181)
  Bottom Layer w0.152: v1(16.26,5.481) 21.968,5.481 22.624,4.825 P2.1@22.624,2.646 ; v1(17.972,19.888) 16.976,18.891 16.976,14.739 18.631,13.084 v1(18.631,12.181)
UFP0: P3.3 U1.16 | length 31
  Top Layer w0.102: v1(3.402,29.29) 3.443,29.25 P3.3@5.112,29.25 ; v1(23.124,33.958) 25.021,33.958 26.636,32.344 26.636,30.698 U1.16@25.641,29.703
  Layer 1 w0.102: v1(3.402,29.29) 3.417,29.276 7.632,29.276 12.782,34.425 21.162,34.425 21.653,33.934 23.1,33.934 v1(23.124,33.958)
UFP1: P3.7 U1.17 | length 29.7
  Top Layer w0.102: v1(3.814,28.25) P3.7@5.112,28.25 ; v1(22.634,33.485) 22.652,33.485 22.853,33.284 25.139,33.284 26.264,32.159 26.264,30.892 U1.17@25.358,29.986
  Layer 2 w0.102: v1(3.814,28.25) 8.429,28.25 14.454,34.275 21.844,34.275 v1(22.634,33.485)
UFP2: P3.10 U1.18 | length 23.9
  Top Layer w0.102: P3.10@9.112,27.75 11.334,27.75 11.795,28.211 11.795,30.686 15.229,34.12 21.322,34.12 22.58,32.863 25.059,32.863 25.912,32.01 25.912,31.106 U1.18@25.075,30.269
UFP3: P3.9 U1.24 | length 24.8
  Top Layer w0.102: v1(3.382,27.755) 3.387,27.75 P3.9@5.112,27.75 ; v1(21.527,32.747) 21.527,32.12 U1.24@22.53,31.117
  Layer 1 w0.102: v1(3.382,27.755) 7.113,27.755 13.126,33.768 20.506,33.768 v1(21.527,32.747)
UFP4: P3.12 U1.25 | length 18.2
  Top Layer w0.102: P3.12@9.112,27.25 9.127,27.265 10.467,27.265 v1(10.482,27.279) ; v1(21.038,32.43) 21.038,32.043 U1.25@22.247,30.834
  Layer 2 w0.102: v1(10.482,27.279) 10.739,27.536 10.739,29.028 15.201,33.491 20.531,33.491 21.038,32.984 v1(21.038,32.43)
UFP5: P3.14 U1.26 | length 18.4
  Top Layer w0.102: P3.14@9.112,26.75 11.16,26.75 12.389,27.979 12.389,30.136 15.526,33.273 19.991,33.273 20.457,32.807 20.457,32.058 U1.26@21.964,30.552
UFP6: P3.11 U1.27 | length 24.7
  Top Layer w0.102: v1(2.97,27.262) 5.1,27.262 P3.11@5.112,27.25 ; v1(19.908,32.579) 19.908,32.042 U1.27@21.681,30.269
  Layer 1 w0.102: v1(2.97,27.262) 7.575,27.262 13.345,33.031 19.431,33.031 19.883,32.579 v1(19.908,32.579)